# Altium PCB PCB1_Pt100.PcbDoc (part 1 of 2)
Units mm, origin at the board's own origin, x right, y up, seen from the top; angles counter-clockwise.
Board outline 125.73 x 96.9 mm, 2 copper layers (Top Layer, Bottom Layer); 98 components, 73 nets, 365 pads, 113 vias.
Unrouted connection lines stored in the file: 47.
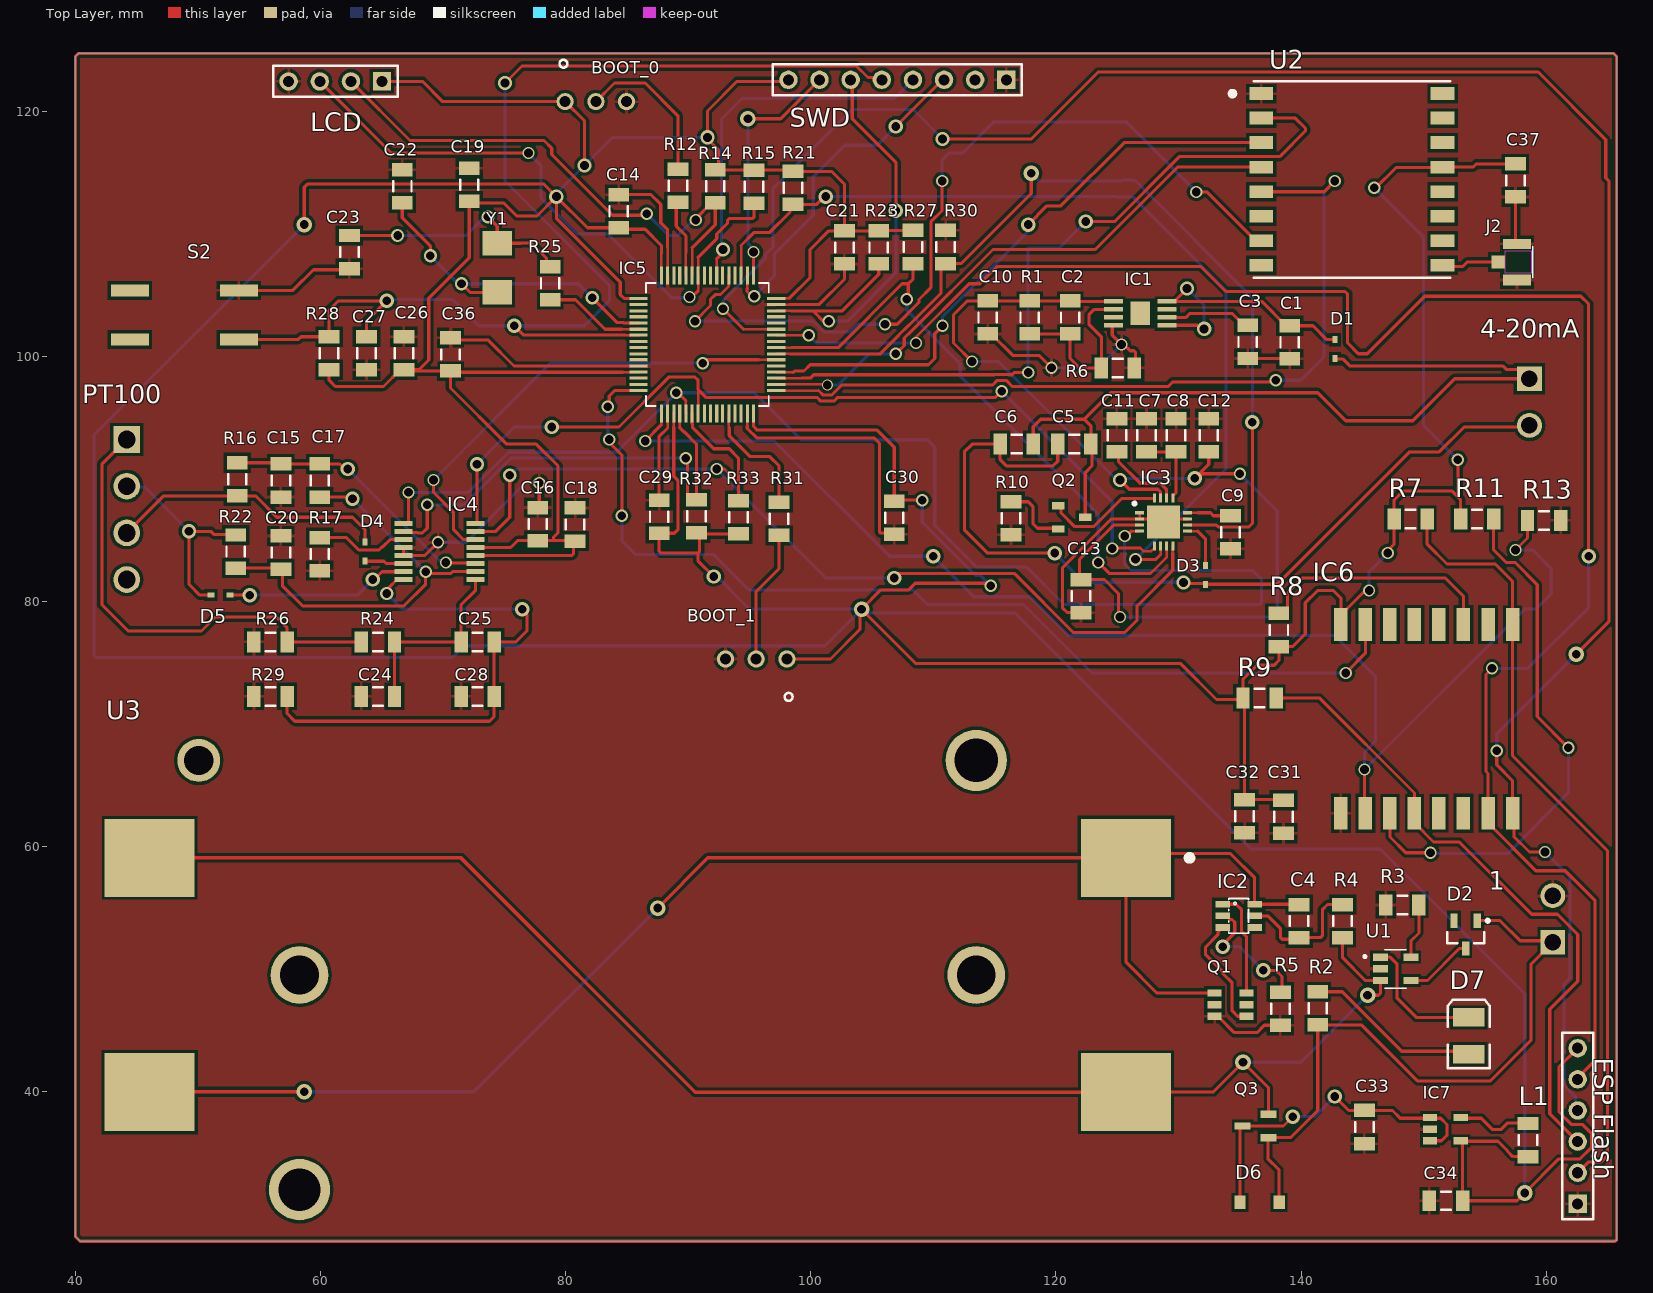
[diagram p0: Top Layer view]
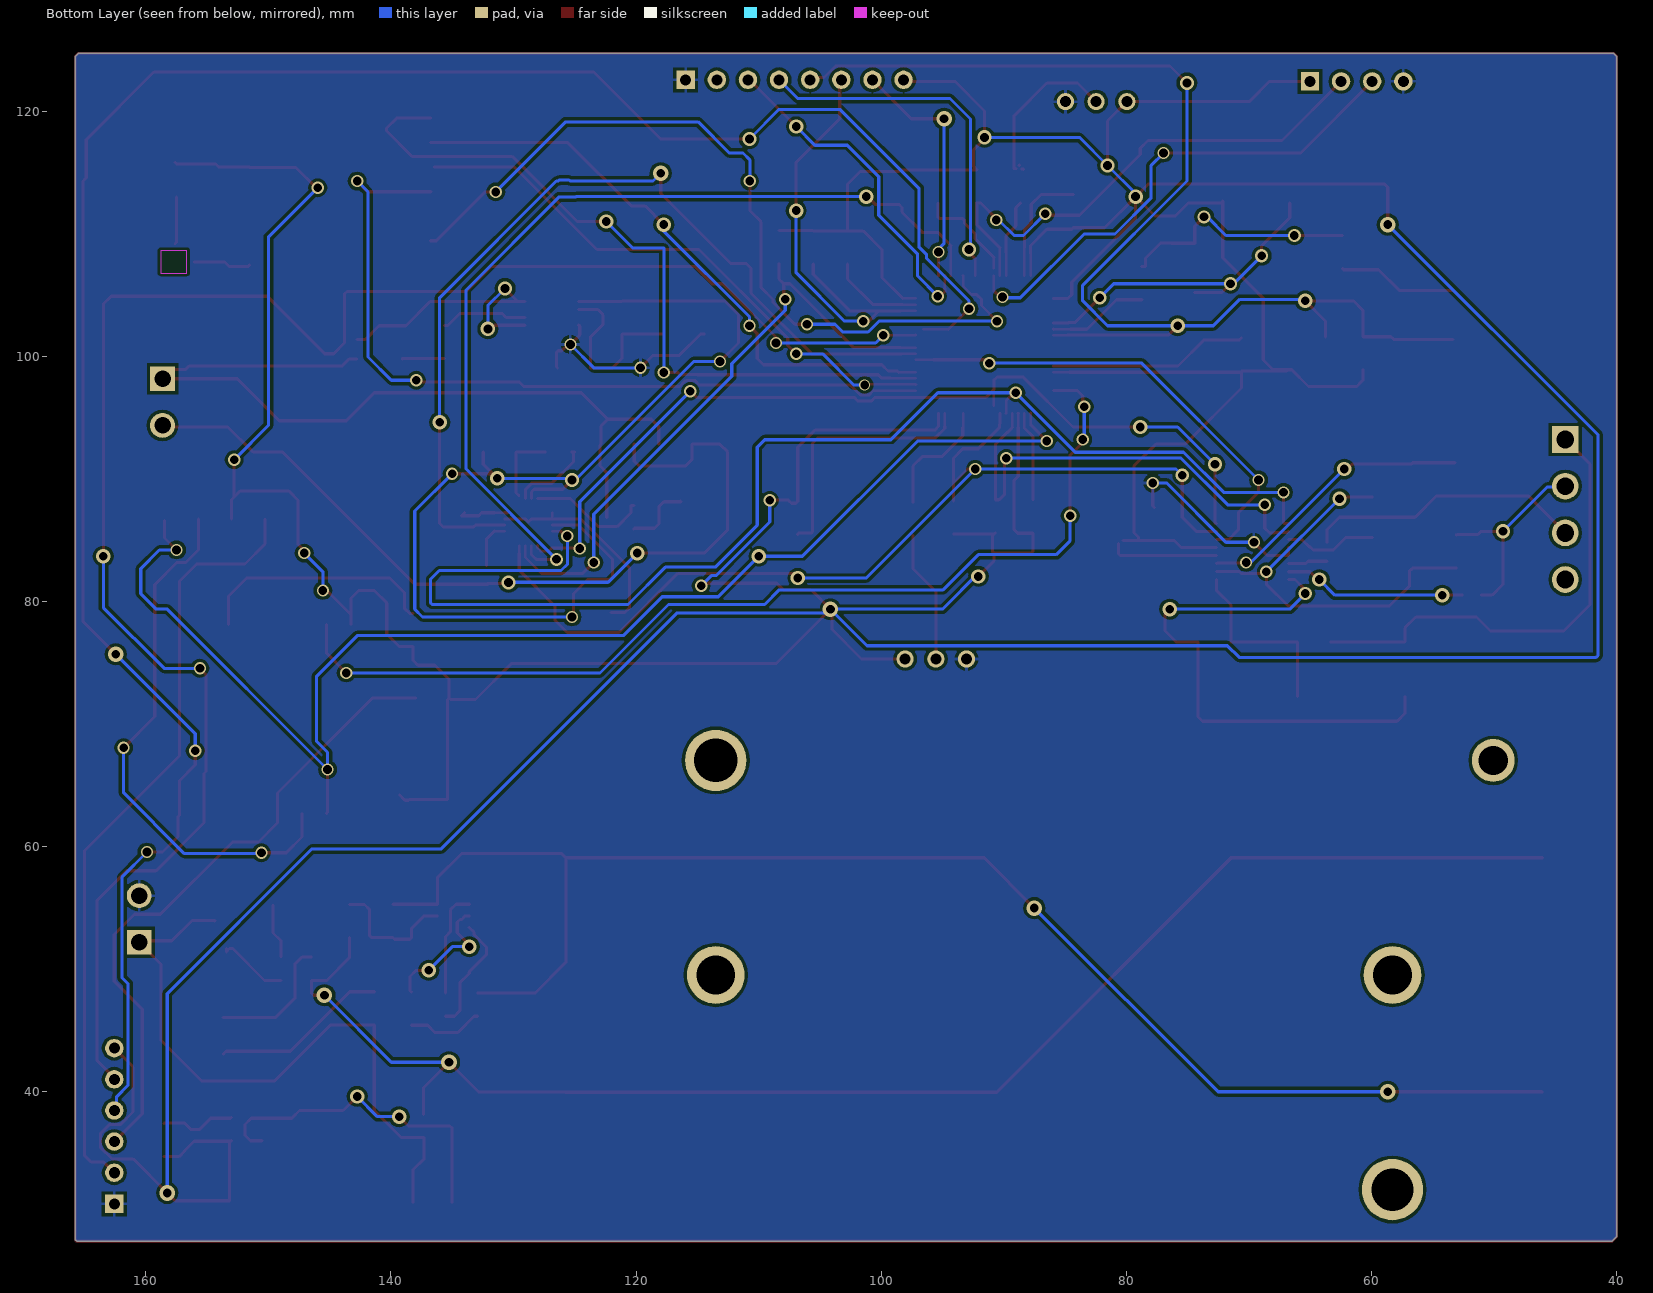
[diagram p1: Bottom Layer view, seen from below]

## Layer stack, top to bottom
Top Solder: solder mask 0.0102, Solder Resist, Dk 3.5
Top Layer: signal copper 0.0356
Dielectric 1: dielectric 0.32, FR-4, Dk 4.8
Bottom Layer: signal copper 0.0356
Bottom Solder: solder mask 0.0102, Solder Resist, Dk 3.5

## Board outline
40.005,28.194 40.005,124.46 40.259,124.714 165.481,124.714 165.735,124.46 165.735,27.94 165.608,27.813 40.386,27.813

## Design rules (kind name [scope] priority, off if disabled: settings)
Clearance [All] p1: gap=0.254 ignorepadtopadclearanceinfootprint=FALSE except(0: Arc-Hole Track-Hole SMDPad-Hole THPad-Hole Via-Hole Fill-Hole Poly-Hole Region-Hole Text-Hole; 0.23: Arc-Arc Arc-Track Arc-SMDPad Track-Track Track-SMDPad SMDPad-SMDPad)
PolygonConnect [All] p1: connectstyle=Relief reliefconductorwidth=0.254 reliefentries=4 polygonreliefangle="90 Angle" airgapwidth=0.254
RoutingVias [All] p1: holewidth=0.711 width=1.27 viastyle="Through Hole" minholewidth=0.711 minwidth=1.27 maxholewidth=0.711 maxwidth=1.27
SolderMaskExpansion [All] p1: expansion=0.102
Width [All] p1: maxlimit=0.254 minlimit=0.254 preferedwidth=0.254
30 further rules are at their usual default settings.

## Components (designator, comment, footprint, x,y, rotation, side; value= is the part's Value field where it differs from the comment)
1 "P=3.81mm Screw terminal   Source:  Datasheet" SHDR2W80P0X381_1X2_802X740X880 160.528,52.197 r90 top
4-20mA "P=3.81mm Screw terminal   Source:  Datasheet" SHDR2W80P0X381_1X2_802X740X880 158.623,98.171 r270 top
BOOT_0 "Slide Switch   Source:  Datasheet" 3PIN_SLIDE_SWITCH 82.463,120.777 r0 top
BOOT_1 "Slide Switch   Source:  Datasheet" 3PIN_SLIDE_SWITCH 95.544,75.311 r180 top
C1 "" C1206 139.065,101.139 r90 top value=10uF
C2 "" C1206 121.158,103.171 r90 top value=10nF
C3 "" C1206 135.636,101.172 r90 top value=10nF
C4 "Cap" C1206 139.827,53.928 r270 top value=100nF
C5 "" C1206 121.492,92.837 r0 top value=0.01uF
C6 "" C1206 116.793,92.837 r0 top value=10uF
C7 "" C1206 127.381,93.552 r270 top value=0.22uF
C8 "" C1206 129.794,93.552 r270 top value=6800pF
C9 "" C1206 134.239,85.645 r270 top value=0.39uF
C10 "" C1206 114.427,103.171 r90 top value=10uF
C11 "" C1206 124.968,93.552 r270 top value=1000pF
C12 "" C1206 132.461,93.552 r270 top value=0.1uF
C13 "" C1206 122.047,80.438 r90 top value=0.1uF
C14 "" C1206 84.328,111.84 r270 top value=100nF
C15 "Cap" C1206 56.769,89.869 r90 top value=2700pF
C16 "" C1206 77.724,86.313 r270 top value=0.1uF
C17 "Cap" C1206 59.944,89.869 r90 top value=0.027uF
C18 "" C1206 80.772,86.28 r270 top value=0.1uF
C19 "" C1206 72.136,113.999 r90 top value=1uF
C20 "Cap" C1206 56.769,83.994 r270 top value=2700pF
C21 "" C1206 102.743,108.886 r90 top value=100nF
C22 "" C1206 66.675,113.872 r90 top value=18pF
C23 "" C1206 62.357,108.505 r90 top value=18pF
C24 "Cap" C1206 64.69,72.263 r0 top value=1800pF
C25 "Cap" C1206 72.818,76.708 r180 top value=0.018uF
C26 "" C1206 66.802,100.25 r270 top value=10uF
C27 "" C1206 63.754,100.25 r90 top value=0.1uF
C28 "Cap" C1206 72.818,72.263 r0 top value=1800pF
C29 "" C1206 87.63,86.915 r270 top value=100nF
C30 "" C1206 106.807,86.821 r90 top value=100nF
C31 "" C1206 138.557,62.437 r90 top value=10uF
C32 "" C1206 135.382,62.484 r90 top value=100nF
C33 "Cap" C1206 145.161,37.131 r90 top value=10uF
C34 "Cap" C1206 151.812,31.115 r0 top value=10uF
C36 "" C1206 70.612,100.156 r270 top value=100nF
C37 "" C1206 157.48,114.347 r90 top value=10uF
D1 "Diodes Inc 40V 350mA, Diode, 2-Pin SOD-523 ZHCS350TA   Source:  Datasheet" SODFL1608X65N 142.748,100.584 r270 top
D2 "Diode BAS116" SOT-23_N 153.416,52.832 r270 top
D3 "Diodes Inc 40V 350mA, Diode, 2-Pin SOD-523 ZHCS350TA   Source:  Datasheet" SODFL1608X65N 132.207,82.169 r90 top
D4 "Diodes Inc 40V 350mA, Diode, 2-Pin SOD-523 ZHCS350TA   Source:  Datasheet" SODFL1608X65N 63.627,84.061 r270 top
D5 "Diodes Inc 40V 350mA, Diode, 2-Pin SOD-523 ZHCS350TA   Source:  Datasheet" SODFL1608X65N 51.829,80.518 r0 top
D6 "Diode, NXP, PMEG3010ER NXP PMEG3010ER, SMT Schottky Diode, 30V 1A, 2-Pin SOD-123   Source:  Datasheet" SODFL3517X110N 136.601,30.988 r0 top
D7 "LED3" 3.5X2.8X1.9 153.67,44.577 r90 top
"ESP Flash" "Header 6" HDR1X6 162.56,30.861 r90 top
IC1 "Vin 3V to 36V, 150mA, Ultra-Low-Noise, High-PSRR Low-Dropout (LDO) Linear Regulator   Source:  Datasheet" SOP65P490X110-9N 126.873,103.505 r0 top
IC2 "DW01A" *SOT23-6 134.904,54.356 r270 top
IC3 "16-Bit Precision DAC With Internal Reference and 4mA-to-20mA Current Loop Drive   Source:  Datasheet" QFN50P400X400X80-17N 128.778,86.487 r0 top
IC4 "24-bit, 2-kSPS, 4-ch, low-power, small-size delta-sigma ADC w/ PGA, VREF, 2x IDACs & SPI interface   Source:  Datasheet" SOP65P640X120-16N 69.723,84.074 r0 top
IC5 "STM32F103RBT6, 32 bit ARM Cortex M3 Microcontroller 72MHz 128kb Flash, 20kb RAM, USB I2C SPI 64-Pin LQFP   Source:  Datasheet" *QFP50P1200X1200X160-64N 91.567,100.965 r0 top
IC6 "RF SOLUTIONS - ESP-12S - WIFI MODULE, 2.484GHZ, 9 I/O PORT   Source:  Datasheet" ESP12S 150.241,71.12 r270 top
IC7 "Sw. Reg. PWM/PFM 2MHz 500mA 3.3V TSOT5   Source:  Datasheet" SOT95P280X110-5N 151.765,36.957 r0 top
J2 "U.FL-R-SMT(01)" *HRS_U.FL-R-SMT(01) 157.607,107.696 r270 top
L1 "" C1206 158.496,36.068 r90 top value=4.7uH
LCD "Header 4" HDR1X4 65.024,122.428 r180 top
PT100 "European P.C.B. type terminal blocks  EK series 4 pole   Source:  Datasheet" SHDR4W90P0X381_1X4_1524X740X85 44.196,93.218 r270 top
Q1 "Dual N-Channel Enhancement Mode MOSFET   Source:  Datasheet" SOT95P285X140-6N 134.239,47.117 r0 top
Q2 "MMBT3904 - NPN switching transistor   Source:  Datasheet" SOT95P230X110-3N 121.285,86.868 r0 top
Q3 "INFINEON - IRLML6401TRPBF - MOSFET, P, MICRO3   Source:  Datasheet" SOT95P237X112-3N 136.271,37.211 r180 top
R1 "" C1206 117.856,103.171 r90 top value=178K
R2 "Res1" C1206 141.351,46.816 r90 top value=330R
R3 "Res1" C1206 148.256,55.245 r0 top value=2K
R4 "Res1" C1206 143.383,53.928 r90 top value=470R
R5 "" C1206 138.303,46.783 r90 top value=2K
R6 "" C1206 125.048,99.06 r180 top value=100K
R7 "" C1206 148.924,86.741 r0 top value=10K
R8 "" C1206 138.176,77.677 r90 top value=10K
R9 "" C1206 136.605,72.136 r0 top value=10K
R10 "1%" C1206 116.332,86.788 r270 top value=20
R11 "" C1206 154.352,86.741 r0 top value=10K
R12 "" C1206 89.154,113.919 r90 top value=10K
R13 "" C1206 159.813,86.614 r0 top value=10K
R14 "" C1206 92.202,113.872 r90 top value=4.7K
R15 "" C1206 95.377,113.839 r90 top value=4.7K
R16 "" C1206 53.213,89.963 r270 top value=4.12K
R17 "" C1206 59.944,83.867 r90 top value=10K
R21 "" C1206 98.552,113.745 r90 top value=10K
R22 "" C1206 53.086,84.074 r90 top value=4.12K
R23 "" C1206 105.537,108.886 r270 top value=100K
R24 "" C1206 64.69,76.708 r180 top value=4.12K
R25 "" C1206 78.74,105.965 r90 top value=300
R26 "10 ppm/C 0.1%" C1206 55.927,76.708 r0 top value=3.24K
R27 "" C1206 108.331,108.919 r90 top value=10K
R28 "" C1206 60.706,100.25 r270 top value=10K
R29 "Res1" C1206 55.927,72.263 r180 top value=4.12K
R30 "" C1206 110.998,108.919 r270 top value=10K
R31 "" C1206 97.409,86.741 r90 top value=10K
R32 "" C1206 90.678,86.948 r270 top value=10K
R33 "" C1206 94.107,86.868 r270 top value=10K
S2 "IP67 Button Tactile Switch, SPST 50 mA 3.5mm Surface Mount   Source:  Datasheet" KSC401G50SHLFS 48.895,103.378 r180 top
SWD "Debug" HDR1X8 115.951,122.555 r180 top
U1 "MCP73831T-2ATI/OT" *SOT95P280X145-5N 147.701,50.038 r0 top
U2 "RFM95W-868S2" *XCVR_RFM95W-868S2 144.145,114.427 r0 top
U3 "KEYSTONE - 1048 - BATTERY HOLDER, 18650 LI-ION, 2CELL, SMD   Source:  Datasheet" 1048 113.493,67.035 r180 top
Y1 "Automotive use crystal unit, 2-pin, NX5032GA   Source:  Datasheet" NX5032GA 74.422,107.22 r90 top

## Footprints (in the part's own frame and the unit in brackets; to place one, negate y for a bottom-side part, rotate by r counter-clockwise, add the part's x,y. Pads: shape width x height; smd on the part's side, far side on the other; paste and mask are expansions set on the pad)
3.5X2.8X1.9 [mm] "SM LED; 2 C-Bend Leads; Body 3.5 x 2.8 x 1.9 mm, inc leads (LxWxH typ)"
  rect 1.5x2.6 smd: 1(-1.5,0) 2(1.5,0)
  silkscreen extent -2.65,-1.7 2.95,1.7
3PIN_SLIDE_SWITCH [mm]
  round 1.4 / inner round 1.524 / far side round 1.4 hole 0.9: 1(-2.5,0) 2(0,0) 3(2.5,0)
  silkscreen extent -2.96,2.77 -2.32,3.41
1048 [mm]
  rect 7.34x6.35 smd: 1(-12.225,7.95) 2(67.425,7.95) 3(67.425,27.06) 4(-12.225,27.06)
  round 4.7 / inner round 1.524 / far side round 4.7 hole 3.17: 5(0,17.505) 7(55.2,17.505)
  round 5 / inner round 1.524 / far side round 5 hole 3.54: 6(0,0)
  round 3.5 / inner round 1.524 / far side round 3.5 hole 2.39: 8(63.42,0)
  round 5 / inner round 1.524 / far side round 5 hole 3.45: 9(55.2,35.01)
  silkscreen extent -17.62,7.72 -17.17,8.17
*HRS_U.FL-R-SMT(01) [mm]
  rect 0.8x2.25 smd: 1(-1.475,0)
  rect 0.9x2.25 smd: 2(1.475,0)
  rect 1.05x1.1 smd: 3(0,-1.55)
  Keep-Out Layer region: -0.903,1.15 0.9,1.15 0.9,-0.963 -0.903,-0.963
  Keep-Out Layer region: -0.903,1.15 0.9,1.15 0.9,-0.963 -0.903,-0.963
  Keep-Out Layer region: -0.903,1.15 0.9,1.15 0.9,-0.963 -0.903,-0.963
  silkscreen extent -1.3,1.3 1.3,1.3
*QFP50P1200X1200X160-64N [mil]
  rect 58x9.84 smd: 1(-221,148) 2(-221,128) 3(-221,108) 4(-221,89) 5(-221,69) 6(-221,49) 7(-221,30) 8(-221,10) 9(-221,-10) 10(-221,-30) 11(-221,-49) 12(-221,-69) 13(-221,-89) 14(-221,-108) 15(-221,-128) 16(-221,-148) 33(221,-148) 34(221,-128) 35(221,-108) 36(221,-89) 37(221,-69) 38(221,-49) 39(221,-30) 40(221,-10) 41(221,10) 42(221,30) 43(221,49) 44(221,69) 45(221,89) 46(221,108) 47(221,128) 48(221,148)
  rect 9.84x58 smd: 17(-148,-221) 18(-128,-221) 19(-108,-221) 20(-89,-221) 21(-69,-221) 22(-49,-221) 23(-30,-221) 24(-10,-221) 25(10,-221) 26(30,-221) 27(49,-221) 28(69,-221) 29(89,-221) 30(108,-221) 31(128,-221) 32(148,-221) 49(148,221) 50(128,221) 51(108,221) 52(89,221) 53(69,221) 54(49,221) 55(30,221) 56(10,221) 57(-10,221) 58(-30,221) 59(-49,221) 60(-69,221) 61(-89,221) 62(-108,221) 63(-128,221) 64(-148,221)
  silkscreen extent -197,-197 197,197
*SOT23-6 [mm]
  rect 0.55x1.2 smd: 1(-0.95,-1.3) 2(0,-1.3) 3(0.95,-1.3) 4(0.95,1.3) 5(0,1.3) 6(-0.95,1.3)
  silkscreen extent -1.42,-0.81 1.42,0.81
*SOT95P280X145-5N [mm]
  rect 1.22x0.6 smd: 1(-1.245,0.95) 2(-1.245,0) 3(-1.245,-0.95) 4(1.245,-0.95) 5(1.245,0.95)
  silkscreen extent -2.6,-1.57 0.88,1.57
*XCVR_RFM95W-868S2 [mm]
  rect 1.95x1.05 smd: 1(-7.4,7) 2(-7.4,5) 3(-7.4,3) 4(-7.4,1) 5(-7.4,-1) 6(-7.4,-3) 7(-7.4,-5) 8(-7.4,-7) 9(7.4,-7) 10(7.4,-5) 11(7.4,-3) 12(7.4,-1) 13(7.4,1) 14(7.4,3) 15(7.4,5) 16(7.4,7)
  silkscreen extent -10.04,-8 8,8
C1206 [mm] "Chip Capacitor, Body 3.2x1.6mm, IPC High Density"
  rect 1.1x1.7 smd: 1(-1.35,0) 2(1.35,0)
  silkscreen extent -0.4,-0.75 0.4,0.75, body extent -1.7,-0.9 1.7,0.9, height 1.3
ESP12S [mm]
  rect 2.66x1.1 smd: 1(-7,7) 2(-7,5) 3(-7,3) 4(-7,1) 5(-7,-1) 6(-7,-3) 7(-7,-5) 8(-7,-7) 9(8.4,-7) 10(8.4,-5) 11(8.4,-3) 12(8.4,-1) 13(8.4,1) 14(8.4,3) 15(8.4,5) 16(8.4,7)
HDR1X4 [mm] "Connector; Header; 4 Position"
  rect 1.5x1.5 hole 0.9: 1(0,0)
  round 1.5 hole 0.9: 2(2.54,0) 3(5.08,0) 4(7.62,0)
  silkscreen extent -1.27,-1.27 8.89,1.27
HDR1X6 [mm] "Connector; Header; 6 Position"
  rect 1.5x1.5 hole 0.9: 1(0,0)
  round 1.5 hole 0.9: 2(2.54,0) 3(5.08,0) 4(7.62,0) 5(10.16,0) 6(12.7,0)
  silkscreen extent -1.27,-1.27 13.97,1.27
HDR1X8 [mm] "Connector; Header; 8 Position"
  rect 1.5x1.5 hole 0.9: 1(0,0)
  round 1.5 hole 0.9: 2(2.54,0) 3(5.08,0) 4(7.62,0) 5(10.16,0) 6(12.7,0) 7(15.24,0) 8(17.78,0)
  silkscreen extent -1.27,-1.27 19.05,1.27
KSC401G50SHLFS [mm]
  rect 3.1x1 smd: 1(-4.445,2) 2(-4.445,-2) 3(4.445,-2) 4(4.445,2)
NX5032GA [mm]
  rect 2x2.4 smd: 1(-2,0) 2(2,0)
QFN50P400X400X80-17N [mm]
  rect 0.73x0.25 smd: 1(-1.95,0.75) 2(-1.95,0.25) 3(-1.95,-0.25) 4(-1.95,-0.75) 9(1.95,-0.75) 10(1.95,-0.25) 11(1.95,0.25) 12(1.95,0.75)
  rect 0.25x0.73 smd: 5(-0.75,-1.95) 6(-0.25,-1.95) 7(0.25,-1.95) 8(0.75,-1.95) 13(0.75,1.95) 14(0.25,1.95) 15(-0.25,1.95) 16(-0.75,1.95)
  rect 2.7x2.7 smd: 17(0,0)
  silkscreen extent -2.5,1.38 -2.25,1.62
SHDR2W80P0X381_1X2_802X740X880 [mm]
  rect 2.025x2.025 / inner rect 1.524x1.524 / far side rect 2.025x2.025 hole 1.35: 1(0,0)
  round 2.025 / inner round 1.524 / far side round 2.025 hole 1.35: 2(3.81,0)
SHDR4W90P0X381_1X4_1524X740X85 [mm]
  rect 2.175x2.175 / inner rect 1.524x1.524 / far side rect 2.175x2.175 hole 1.45: 1(0,0)
  round 2.175 / inner round 1.524 / far side round 2.175 hole 1.45: 2(3.81,0) 3(7.62,0) 4(11.43,0)
SODFL1608X65N [mm]
  rect 0.57x0.42 smd: 1(-0.775,0) 2(0.775,0)
SODFL3517X110N [mm]
  rect 0.92x1.08 smd: 1(-1.6,0) 2(1.6,0)
SOP65P490X110-9N [mm]
  rect 1.55x0.35 smd: 1(-2.2,0.975) 2(-2.2,0.325) 3(-2.2,-0.325) 4(-2.2,-0.975) 5(2.2,-0.975) 6(2.2,-0.325) 7(2.2,0.325) 8(2.2,0.975)
  rect 1.6x1.92 smd: 9(0,0)
SOP65P640X120-16N [mm]
  rect 1.475x0.42 smd: 1(-2.938,2.275) 2(-2.938,1.625) 3(-2.938,0.975) 4(-2.938,0.325) 5(-2.938,-0.325) 6(-2.938,-0.975) 7(-2.938,-1.625) 8(-2.938,-2.275) 9(2.938,-2.275) 10(2.938,-1.625) 11(2.938,-0.975) 12(2.938,-0.325) 13(2.938,0.325) 14(2.938,0.975) 15(2.938,1.625) 16(2.938,2.275)
SOT95P230X110-3N [mm]
  rect 1.05x0.6 smd: 1(-1.1,0.95) 2(-1.1,-0.95) 3(1.1,0)
SOT95P237X112-3N [mm]
  rect 1.3x0.6 smd: 1(-1.05,0.95) 2(-1.05,-0.95) 3(1.05,0)
SOT95P280X110-5N [mm]
  rect 1.15x0.6 smd: 1(-1.25,0.95) 2(-1.25,0) 3(-1.25,-0.95) 4(1.25,-0.95) 5(1.25,0.95)
SOT95P285X140-6N [mm]
  rect 1.15x0.6 smd: 1(-1.3,0.95) 2(-1.3,0) 3(-1.3,-0.95) 4(1.3,-0.95) 5(1.3,0) 6(1.3,0.95)
SOT-23_N [mm] "SOT23, 3-Leads, Body 2.9x1.3mm, Pitch 0.95mm, Lead Span 2.5mm, IPC Medium Density"
  rect 1.15x0.6 smd: 1(-1.125,0.95) 2(-1.125,-0.95) 3(1.125,0)
  silkscreen extent -1.25,-1.5 0.7,1.93, body extent -0.7,-1.5 0.7,1.5, height 1.1

## Part data
1 4-20mA: library part DB125-3.81-2P, Manufacturer_Name=Dibo, Package=SHDR2W80P0X381_1X2_802X740X880, DeviceSetName=DB125-3.81-2P, GateName_1=G$1, Height=8.8mm, LibraryName=DB125-3.81-2P, Manufacturer_Part_Number=DB125-3.81-2P, SymbolName_1=DB125-3.81-2P
BOOT_0 BOOT_1: library part EG1218, Manufacturer_Name=E-Switch, Package=3PIN_SLIDE_SWITCH, DeviceSetName=EG1218, GateName_1=G$1, Height=mm, LibraryName=EG1218, Manufacturer_Part_Number=EG1218, Mouser_Part_Number=612-EG1218, Mouser_Price-Stock=https://www.mouser.co.uk/ProductDetail/E-Switch/EG1218?qs=xDsBkp9LkocT0c8K%252B5e%2FgA%3D%3D, SymbolName_1=EG1218
C1 C2 C3 C5 C6 C7 C8 C9 C10 C11 C12 C13 C14 C16 C18 C19 C21 C22 C23 C26 C27 C29 C30 C31 C32 C36 C37: library part Cap, "Capacitor", LatestRevisionDate=17-Jul-2002, LatestRevisionNote="Re-released for DXP Platform.", PackageDescription="Radial Cap, Thru-Hole; 2 Leads; 0.3 in Pin Spacing", PackageReference=RAD-0.3, Published=8-Jun-2000, Publisher="Altium Limited"
C4 C15 C17 C20 C24 C25 C28 C33 C34: "Capacitor", LatestRevisionDate=17-Jul-2002, LatestRevisionNote="Re-released for DXP Platform.", PackageDescription="Radial Cap, Thru-Hole; 2 Leads; 0.3 in Pin Spacing", PackageReference=RAD-0.3, Published=8-Jun-2000, Publisher="Altium Limited"
D1 D3 D4 D5: library part ZHCS350TA, Manufacturer_Name="Diodes Inc.", Package=SODFL1608X65N, Allied_Number=70438611, Allied_Price-Stock=https://www.alliedelec.com/diodesinc-zhcs350ta/70438611/, DeviceSetName=ZHCS350TA, GateName_1=G$1, Height=0.65mm, LibraryName=ZHCS350TA, Manufacturer_Part_Number=ZHCS350TA, Mouser_Part_Number=522-ZHCS350TA, Mouser_Price-Stock=https://www.mouser.co.uk/ProductDetail/Diodes-Incorporated/ZHCS350TA?qs=%2F4dsY8i%2FUxLp1LQSBxPJBA%3D%3D, RS_Part_Number=7515168P, RS_Price-Stock=http://uk.rs-online.com/web/p/products/7515168P, SymbolName_1=ZHCS350TA
D2: "Silicon Low Leakage Diode", ComponentLink1Description="Manufacturer Link", ComponentLink1URL=http://www.infineon.com/, ComponentLink2Description=Datasheet, ComponentLink2URL=http://www.infineon.com/upload/Document/cmc_upload/documents/080/656/bas116series.pdf, DatasheetVersion=Oct-1999, LatestRevisionDate=29-May-2009, LatestRevisionNote="IPC-7351 Footprint Added.", Note="Pin 2 is not connected and not drawn.", PackageDescription="3-Pin SOT-23 Package 0.95 mm Pitch, 2.5 mm Lead Span", PackageReference=SOT-23, PackageVersion=Sep-2001, Published=21-Mar-2003, Publisher="Altium Limited"
D6: library part PMEG3010ER, Manufacturer_Name=Nexperia, Package=SODFL3517X110N, DeviceSetName=PMEG3010ER, GateName_1=G$1, Height=1.1mm, LibraryName=PMEG3010ER, Manufacturer_Part_Number=PMEG3010ER, Mouser_Part_Number=N/A, Mouser_Price-Stock=https://www.mouser.com/Search/Refine.aspx?Keyword=N%2FA, SymbolName_1=PMEG3010ER
D7: "Typical BLUE SiC LED", DatasheetVersion=16-Apr-2002, LatestRevisionDate=17-Dec-2003, LatestRevisionNote="PCB Footprint replaced.", PackageDescription="SM LED; 2 C-Bend Leads; Body 3.5 x 2.8 x 1.9 mm, inc leads (LxWxH typ)", PackageReference=3.5X2.8X1.9, PackageVersion=16-Apr-2002, Published=8-Jun-2000, Publisher="Altium Limited"
"ESP Flash": "Header, 6-Pin", LatestRevisionDate=17-Jul-2002, LatestRevisionNote="Re-released for DXP Platform.", Publisher="Altium Limited"
IC1: library part TPS7A4901DGNR, Manufacturer_Name="Texas Instruments", Package=SOP65P490X110-9N, DeviceSetName=TPS7A4901DGNR, GateName_1=G$1, Height=1.1mm, LibraryName=TPS7A4901DGNR, Manufacturer_Part_Number=TPS7A4901DGNR, Mouser_Part_Number=595-TPS7A4901DGNR, Mouser_Price-Stock=https://www.mouser.co.uk/ProductDetail/Texas-Instruments/TPS7A4901DGNR?qs=Ze4%2FuFuz19J1%252B3gTImnAgQ%3D%3D, SymbolName_1=TPS7A4901DGNR
IC2: "One Cell Lithium-ion/Polymer Battery Protection IC", Package="Package Analog Devices", Availability=Unavailable, MF="Fortune Semiconductor", MP=DW01A, Price=None, SnapEDA_Link=https://www.snapeda.com/parts/DW01A/Fortune%20Semiconductor/view-part/4388554/?ref=snap
IC3: library part DAC161S997RGHR, Manufacturer_Name="Texas Instruments", Package=QFN50P400X400X80-17N, DeviceSetName=DAC161S997RGHR, GateName_1=G$1, Height=0.8mm, LibraryName=DAC161S997RGHR, Manufacturer_Part_Number=DAC161S997RGHR, Mouser_Part_Number=595-DAC161S997RGHR, Mouser_Price-Stock=https://www.mouser.co.uk/ProductDetail/Texas-Instruments/DAC161S997RGHR?qs=NKcqT0VB0vDKlEVGENNOUQ%3D%3D, SymbolName_1=DAC161S997RGHR
IC4: library part ADS1220IPWR, Manufacturer_Name="Texas Instruments", Package=SOP65P640X120-16N, DeviceSetName=ADS1220IPWR, GateName_1=G$1, Height=1.2mm, LibraryName=ADS1220IPWR, Manufacturer_Part_Number=ADS1220IPWR, Mouser_Part_Number=595-ADS1220IPWR, Mouser_Price-Stock=https://www.mouser.co.uk/ProductDetail/Texas-Instruments/ADS1220IPWR?qs=5GI1giJCN%252BI6s%2FWJGbZXXQ%3D%3D, SymbolName_1=ADS1220IPWR
IC5: library part STM32F103RBT6, Manufacturer_Name=STMicroelectronics, Package=QFP50P1200X1200X160-64N, Allied_Number=70391006, Allied_Price-Stock=http://www.alliedelec.com/stmicroelectronics-stm32f103rbt6/70391006/, DeviceSetName=STM32F103RBT6, GateName_1=G$1, Height=1.6mm, LibraryName=STM32F103RBT6, Manufacturer_Part_Number=STM32F103RBT6, Mouser_Part_Number=511-STM32F103RBT6, Mouser_Price-Stock=https://www.mouser.co.uk/ProductDetail/STMicroelectronics/STM32F103RBT6?qs=bhCVus9SdFv12dJRZaBmJg%3D%3D, RS_Part_Number=0402251P, RS_Price-Stock=http://uk.rs-online.com/web/p/products/0402251P, SymbolName_1=STM32F103RBT6
IC6: library part ESP-12S, Manufacturer_Name="RF SOLUTIONS", Package=ESP12S, DeviceSetName=ESP-12S, GateName_1=G$1, Height=3mm, LibraryName=ESP-12S, Manufacturer_Part_Number=ESP-12S, Mouser_Part_Number=223-ESP-12S, Mouser_Price-Stock=https://www.mouser.co.uk/ProductDetail/RF-Solutions/ESP-12S?qs=UkDUCjYnTB27YArJ5wHUxg%3D%3D, RS_Part_Number=1697593, RS_Price-Stock=http://uk.rs-online.com/web/p/products/1697593, SymbolName_1=ESP-12S
IC7: library part MCP1603T-330I_OS, Manufacturer_Name=Microchip, Manufacturer_Part_Number=MCP1603T-330I/OS, Package=SOT95P280X110-5N, Allied_Number=70046434, Allied_Price-Stock=http://www.alliedelec.com/microchip-technology-inc-mcp1603t-330i-os/70046434/, DeviceSetName=MCP1603T-330I_OS, GateName_1=G$1, Height=1.1mm, LibraryName=MCP1603T-330I_OS, Mouser_Part_Number=579-MCP1603T-330I/OS, Mouser_Price-Stock=https://www.mouser.co.uk/ProductDetail/Microchip-Technology/MCP1603T-330I-OS?qs=usxtMOJb1RzTHtIF7bKmHg%3D%3D, RS_Part_Number=7386235P, RS_Price-Stock=http://uk.rs-online.com/web/p/products/7386235P, SymbolName_1=MCP1603T-330I_OS
J2: "U.FL _UMCC_ Connector Receptacle, Male Pin 50Ohm Surface Mount Solder", Package=None, Availability=Unavailable, MF=Hirose, MP=U.FL-R-SMT_01_, Price=None, SnapEDA_Link=https://www.snapeda.com/parts/U.FL-R-SMT%2801%29/Hirose%20Electric%20Co%20Ltd/view-part/1218914/?ref=snap
L1 R1 R5 R6 R7 R8 R9 R10 R11 R12 R13 R14 R15 R16 R17 R21 R22 R23 R24 R25 R26 R27 R28 R30 R31 R32 R33: library part Res1, "Resistor", LatestRevisionDate=17-Jul-2002, LatestRevisionNote="Re-released for DXP Platform.", PackageDescription="Axial Device, Thru-Hole; 2 Leads; 0.3 in Pin Spacing", PackageReference=AXIAL-0.3, Published=8-Jun-2000, Publisher="Altium Limited"
LCD: "Header, 4-Pin", LatestRevisionDate=17-Jul-2002, LatestRevisionNote="Re-released for DXP Platform.", Publisher="Altium Limited"
PT100: library part EK381V-04P, Manufacturer_Name=Dinkle, Package=SHDR4W90P0X381_1X4_1524X740X85, DeviceSetName=EK381V-04P, GateName_1=G$1, Height=8.5mm, LibraryName=EK381V-04P, Manufacturer_Part_Number=EK381V-04P, SymbolName_1=EK381V-04P
Q1: library part UMW8205A, Manufacturer_Name=UMW, Package=SOT95P285X140-6N, DeviceSetName=UMW8205A, GateName_1=G$1, Height=1.4mm, LibraryName=UMW8205A, Manufacturer_Part_Number=UMW8205A, SymbolName_1=UMW8205A
Q2: library part MMBT3904VL, Manufacturer_Name=Nexperia, Package=SOT95P230X110-3N, DeviceSetName=MMBT3904VL, GateName_1=G$1, Height=1.1mm, LibraryName=MMBT3904VL, Manufacturer_Part_Number=MMBT3904VL, Mouser_Part_Number=771-MMBT3904VL, Mouser_Price-Stock=https://www.mouser.co.uk/ProductDetail/Nexperia/MMBT3904VL?qs=cnAQGvEIVkKbCwIpHJoHxQ%3D%3D, SymbolName_1=MMBT3904VL
Q3: library part IRLML6401TRPBF, Manufacturer_Name=Infineon, Package=SOT95P237X112-3N, Allied_Number=70017403, Allied_Price-Stock=https://www.alliedelec.com/infineon-irlml6401trpbf/70017403/, DeviceSetName=IRLML6401TRPBF, GateName_1=G$1, Height=1.12mm, LibraryName=IRLML6401TRPBF, Manufacturer_Part_Number=IRLML6401TRPBF, Mouser_Part_Number=942-IRLML6401TRPBF, Mouser_Price-Stock=https://www.mouser.co.uk/ProductDetail/Infineon-Technologies/IRLML6401TRPBF?qs=9%252BKlkBgLFf1wviSVMCNr8A%3D%3D, RS_Part_Number=0301316P, RS_Price-Stock=http://uk.rs-online.com/web/p/products/0301316P, SymbolName_1=IRLML6401TRPBF
R2 R3 R4 R29: "Resistor", LatestRevisionDate=17-Jul-2002, LatestRevisionNote="Re-released for DXP Platform.", PackageDescription="Axial Device, Thru-Hole; 2 Leads; 0.3 in Pin Spacing", PackageReference=AXIAL-0.3, Published=8-Jun-2000, Publisher="Altium Limited"
S2: library part KSC222GLFS, Manufacturer_Name="C & K COMPONENTS", Package=KSC401G50SHLFS, DeviceSetName=KSC222GLFS, GateName_1=G$1, Height=mm, LibraryName=KSC222GLFS, Manufacturer_Part_Number=KSC222GLFS, Mouser_Part_Number=611-KSC222GLFS, Mouser_Price-Stock=https://www.mouser.co.uk/ProductDetail/CK/KSC222GLFS?qs=8LLMQjkBYsIt%2F%2FXoP9fBVA%3D%3D, RS_Part_Number=8998582, RS_Price-Stock=http://uk.rs-online.com/web/p/products/8998582, SymbolName_1=KSC222GLFS
SWD: library part "Header 8", "Header, 8-Pin", LatestRevisionDate=17-Jul-2002, LatestRevisionNote="Re-released for DXP Platform.", Publisher="Altium Limited"
U1: "MCP73831 Series Li-Ion/Li-Pol 15 mA - 500 mA 4.2 V Charge Controller - SOT-23-5", Package="SOT-23 Microchip", Availability=Unavailable, MF=Microchip, MP=MCP73831T-2ATI/OT, Price=None, SnapEDA_Link=https://www.snapeda.com/parts/MCP73831T-2ATI/OT/Microchip/view-part/51423/?ref=snap
U2: "RFM95W 869/915MHZ RF Transceiver Module", Package="SMD-16 Hope Microelectronics", Availability=Unavailable, MF=RF, MP=RFM95W-868S2, Price=None, SnapEDA_Link=https://www.snapeda.com/parts/RFM95W-868S2/RF%20Solutions/view-part/329180/?ref=snap
U3: library part 1048, Manufacturer_Name="Keystone Electronics", Allied_Number=70182390, Allied_Price-Stock=https://www.alliedelec.com/keystone-electronics-1048/70182390/, DeviceSetName=1048, GateName_1=G$1, Height=mm, LibraryName=1048, Manufacturer_Part_Number=1048, Mouser_Part_Number=534-1048, Mouser_Price-Stock=https://www.mouser.com/Search/Refine.aspx?Keyword=534-1048, Package=1048, SymbolName_1=1048
Y1: library part NX5032GA-8.000M-STD-CSU-1, Manufacturer_Name=NDK, Package=NX5032GA, DeviceSetName=NX5032GA-8.000M-STD-CSU-1, GateName_1=G$1, Height=mm, LibraryName=NX5032GA-8.000M-STD-CSU-1, Manufacturer_Part_Number=NX5032GA-8.000M-STD-CSU-1, Mouser_Part_Number=344-NX5032GA8MCSU1, Mouser_Price-Stock=https://www.mouser.co.uk/ProductDetail/NDK/NX5032GA-8000M-STD-CSU-1?qs=55YtniHzbhDXxgRf1t%252Bj4Q%3D%3D, RS_Part_Number=1847981, RS_Price-Stock=http://uk.rs-online.com/web/p/products/1847981, SymbolName_1=NX5032GA-8.000M-STD-CSU-1

## Via types
v1: diameter 1, hole 0.711, Top Layer to Bottom Layer, 58 vias
v2: diameter 1.17, hole 0.711, Top Layer to Bottom Layer, 36 vias
v3: diameter 1.27, hole 0.711, Top Layer to Bottom Layer, 10 vias
v4: diameter 1.07, hole 0.711, Top Layer to Bottom Layer, 8 vias
v5: diameter 0.9, hole 0.7, Top Layer to Bottom Layer, 1 vias

## Nets (pads, with @x,y where several pads share a name; then routed paths per layer and width w, separated by ;. In a path a pad name is that pad's centre, name@x,y a point inside that pad or via, vN(x,y) a via of type N, cw(c..) or ccw(c..) an arc to the next point about the centre after c; other vN are vias at no path point)
+3.3v: "ESP Flash.6" BOOT_0.1 BOOT_1.1 C14.2 C16.2 C18.2 C19.1 C21.2 C26.2 C29.2 C30.2 C31.2 C32.2 C34.2 C36.2 C37.2 IC4.12 IC4.13 IC5.1 IC5.13 IC5.19 IC5.32 IC5.48 IC5.64 IC6.8 IC7.4 L1.1 LCD.1 R7.1 R8.1 R9.1 R11.1 R14.2 R15.2 R21.2 R23.1 R27.2 R28.2 R32.2 R33.2 SWD.8 U2.13 | length 648.4
  Top Layer w0.21: 84.684,98.704 IC5.13 ; 88.822,94.234 IC5.19@88.822,95.35 ; 95.326,94.285 IC5.32 ; IC5.48 98.247,104.724
  Top Layer w0.221: 84.76,104.724 IC5.1 ; IC5.64 87.808,108.407
  Top Layer w0.254: v3(58.674,110.744) 58.674,113.792 58.928,114.046 78.232,114.046 v2(79.248,113.03) ; R28.2 60.706,98.044 61.214,97.536 65.138,97.536 66.502,98.9 C26.2 ; LCD.1 68.326,122.428 69.977,120.777 BOOT_0.1 81.534,119.206 v2(81.534,115.57) ; IC4.12 80.496,83.749 80.645,83.898 C18.2@80.645,84.709 ; IC4.13 75.509,84.399 76.073,84.963 C16.2 78.994,84.963 ; C18.2@80.264,84.963 78.994,84.963 ; 84.684,98.704 70.714,98.704 C36.2 ; 84.76,104.724 84.455,105.029 84.455,106.045 79.248,111.252 v2(79.248,113.03) ; 87.808,108.407 87.808,109.042 86.487,110.363 84.455,110.363 C14.2 81.788,110.49 v2(79.248,113.03) ; 88.822,94.234 88.822,90.209 89.154,89.877 89.154,85.852 88.867,85.565 C29.2 87.63,84.096 87.779,83.947 90.783,83.947 ; IC5.19@88.822,95.35 IC5.19 ; R32.2 R32.2@90.758,85.518 ; v2(92.075,82.042) 90.783,83.334 90.783,83.947 ; R33.2 R32.2@90.758,85.518 ; 95.326,94.285 95.631,93.98 105.41,93.98 106.807,92.583 C30.2 106.967,88.011 107.315,88.011 107.569,88.265 v1(109.093,88.265) ; BOOT_1.1 101.6,75.311 104.013,77.724 104.013,79.248 v3(104.14,79.375) ; SWD.8 98.044,122.428 93.98,122.428 91.567,120.015 v2(91.567,117.856) 91.567,117.729 92.456,116.84 92.456,115.476 R14.2 92.235,115.189 R15.2 98.458,115.189 R21.2 98.585,115.062 101.727,115.062 102.743,114.046 C21.2 ; 98.247,104.724 99.949,106.426 99.949,108.712 101.473,110.236 C21.2 ; R27.2 105.57,110.269 R23.1 C21.2 ; v1(114.681,81.28) 114.477,81.484 108.517,81.484 107.982,80.949 105.714,80.949 v3(104.14,79.375) ; C31.2@139.28,64.21 138.857,63.787 C31.2 138.51,63.834 C32.2 135.382,72.009 R9.1 ; IC6.8 IC6.8@143.241,78.9 ; v1(145.542,80.899) 145.24,80.899 IC6.8@143.241,78.9 ; v1(145.957,113.744) 146.084,113.744 147.735,115.395 151.513,115.395 U2.13 151.561,115.443 154.051,115.443 154.305,115.697 C37.2 C37.2@157.607,115.824 ; v1(147.066,83.947) 147.066,84.149 147.574,84.657 R7.1 147.574,88.265 148.336,89.027 152.273,89.027 152.781,88.519 ; v1(152.781,91.567) 152.781,88.519 ; R11.1 153.002,88.298 152.781,88.519 ; IC7.4 IC7.4@153.048,35.974 ; L1.1 157.265,34.718 156.845,35.138 156.845,35.179 156.05,35.974 IC7.4@153.048,35.974 ; 162.56,43.561 161.036,42.037 161.036,38.354 162.04,37.35 162.929,37.35 163.691,36.588 163.691,35.473 162.75,34.532 161.024,34.532 v3(158.242,31.75) 157.607,31.115 C34.2 153.162,35.86 IC7.4@153.048,35.974 ; C26.2 68.039,98.9 68.834,99.695 68.834,104.742 72.136,108.044 C19.1 72.263,112.522 74.93,112.522 76.003,111.449 77.667,111.449 v2(79.248,113.03) ; C26.2 66.896,98.806 C36.2 ; C36.2 70.612,97.409 75.184,92.837 77.597,92.837 79.375,91.059 79.375,85.598 78.994,85.217 78.994,84.963 ; R32.2@90.758,85.518 90.932,85.344 90.932,84.096 90.783,83.947 ; v3(104.14,79.375) 108.585,74.93 130.175,74.93 133.096,72.009 135.128,72.009 R9.1 ; R9.1 135.255,73.66 136.398,74.803 137.795,74.803 138.176,75.184 R8.1 139.319,76.327 140.335,77.343 140.335,79.883 141.351,80.899 142.621,80.899 143.241,80.279 IC6.8@143.241,78.9
  Bottom Layer w0.254: v3(58.674,110.744) 41.529,93.599 41.529,75.587 41.678,75.438 70.803,75.438 71.757,76.392 101.157,76.392 v3(104.14,79.375) ; v2(79.248,113.03) 79.248,113.284 v2(81.534,115.57) 83.82,117.856 v2(91.567,117.856) ; v2@91.948,82.423 94.996,79.375 v3(104.14,79.375) ; v1(109.093,88.265) 109.093,86.487 113.474,82.105 113.855,82.105 v1(114.681,81.28) ; v1(145.542,80.899) 145.542,82.423 v1(147.066,83.947) ; v1(145.957,113.744) 149.987,109.714 149.987,94.361 v1(152.781,91.567) ; v3(158.242,31.75) 158.242,48.006 146.431,59.817 135.89,59.817 116.639,79.068 104.447,79.068 v3(104.14,79.375)
+5v: 1.1 D2.1 D6.2 Q3.1 R2.1 | length 53.9
  Top Layer w0.254: D6.2 138.201,33.63 137.287,34.544 137.287,36.227 Q3.1 139.131,36.261 141.351,38.481 R2.1 144.907,45.466 149.479,40.894 155.448,40.894 158.75,44.196 158.75,50.419 1.1 ; D2.1 154.384,53.975 156.21,53.975 157.861,52.324 1.1@160.528,52.324
GND: 1.2 "ESP Flash.1" BOOT_0.3 BOOT_1.3 C1.1 C3.1 C7.1 C8.1 C9.2 C10.1 C11.1 C12.1 C13.1 C14.1 C15.1 C16.1 C18.1 C19.2 C20.1 C21.1 C22.2 C23.1 C24.1 C26.1 C27.1 C28.1 C29.1 C30.1 C31.1 C32.1 C33.1 C34.1 C36.1 C37.1 IC1.4 IC3.1 IC3.2 IC3.11 IC3.17 IC4.4 IC4.5 IC5.12 IC5.18 IC5.31 IC5.47 IC5.63 IC6.9 IC7.2 J2.1 J2.2 LCD.4 Q1.3 R3.1 R5.1 R6.1 R10.2 R13.2 R17.1 R26.1 R29.2 R30.1 S2.2 SWD.1 U1.2 U2.1 | length 136.6
  Top Layer w0.21: 84.708,99.212 IC5.12 ; 88.316,94.158 IC5.18 ; IC5.63 88.316,108.838 ; 94.818,94.309 IC5.31 ; IC5.47 98.223,104.216 ; IC3.2@126.843,86.737 IC3.1@126.843,87.237
  Top Layer w0.254: S2.2 57.753,105.378 59.436,107.061 62.263,107.061 C23.1 ; IC4.4 IC4.5 68.509,83.749 v1(69.596,84.836) ; C36.1 70.772,101.346 73.66,101.346 75.794,99.212 84.708,99.212 ; C16.1 77.851,87.79 v1(77.851,89.662) ; C14.1 86.962,113.19 87.757,112.395 87.757,110.896 88.316,110.337 88.316,108.838 ; C29.1 87.63,93.472 88.316,94.158 ; 94.818,94.309 94.818,94.108 95.582,93.345 105.156,93.345 105.6,92.901 105.6,85.662 105.664,85.598 106.68,85.598 C30.1 ; 98.223,104.216 100.66,104.216 102.743,106.299 C21.1 ; C10.1 114.727,101.821 116.472,100.076 118.618,100.076 v1(119.634,99.06) ; C13.1 120.937,79.088 120.523,79.502 120.523,82.726 124.533,86.737 IC3.2 127.064,86.737 127.082,86.719 128.546,86.719 IC3.17 129.028,86.737 IC3.11 ; IC1.4 124.635,102.53 124.587,102.482 124.587,101.727 v1(125.349,100.965) 125.551,100.965 126.059,100.457 126.343,100.457 126.492,100.308 126.492,99.154 R6.1 ; Q1.3 133.214,46.167 134.55,44.831 136.398,44.831 137,45.433 R5.1 ; C3.1 139.032,99.822 C1.1 ; C37.1 157.48,109.298 J2.1
  Bottom Layer w0.254: v1(69.596,84.836) 71.882,84.836 76.708,89.662 v1(77.851,89.662) ; v1(119.634,99.06) 123.444,99.06 v1(125.349,100.965)
Net4-20mA_1: 4-20mA.1 C5.2 C6.2 D1.2 Q2.3 | length 70.5
  Top Layer w0.254: C6.2 118.143,94.267 118.745,94.869 122.301,94.869 ; Q2.3 122.385,90.508 122.936,91.059 122.936,92.743 C5.2 122.842,94.328 122.301,94.869 ; D1.2@142.748,99.796 143.384,99.796 143.961,99.219 156.432,99.219 156.718,98.933 157.861,98.933 4-20mA.1 152.527,98.171 149.098,94.742 143.637,94.742 141.351,97.028 124.46,97.028 122.301,94.869
Net4-20mA_2: 4-20mA.2 C5.1 C6.1 D3.1 | length 70.6
  Top Layer w0.254: v2(119.888,83.947) 114.427,83.947 112.522,85.852 112.522,92.202 113.157,92.837 C6.1 115.443,91.567 115.951,91.059 119.761,91.059 120.142,91.44 C5.1 ; v2(130.397,81.553) 130.493,81.458 132.143,81.458 D3.1@132.194,81.407 ; D3.1@132.08,81.407 D3.1@132.194,81.407 ; D3.1 D3.1@132.194,81.407 ; 4-20mA.2 158.496,94.234 153.289,94.234 151.257,92.202 148.844,92.202 138.049,81.407 D3.1@132.194,81.407
  Bottom Layer w0.254: v2(119.888,83.947) 122.269,81.566 v2@130.27,81.566
NetBOOT_0_2: BOOT_0.2 R12.2 | length 13.1
  Top Layer w0.254: BOOT_0.2 83.987,122.301 86.487,122.301 89.154,119.634 R12.2@89.154,115.325 ; R12.2@88.415,115.258 R12.2@88.534,115.28 ; R12.2@88.716,115.582 R12.2@88.739,115.582 ; R12.2@89.002,115.297 89.144,115.323 R12.2@89.154,115.325 ; R12.2 R12.2@89.154,115.325
NetBOOT_1_2: BOOT_1.2 R31.1 | length 10.9
  Top Layer w0.254: BOOT_1.2 95.544,80.812 97.409,82.677 R31.1
NetC1_2: C1.2 D1.1 IC1.5 IC1.8 | length 22.4
  Top Layer w0.254: IC1.5 131.537,102.53 ; IC1.8 IC1.8@129.673,104.48 ; v2@130.476,105.283 IC1.8@129.673,104.48 ; D1.1 142.1,101.359 140.97,102.489 C1.2 138.765,102.489 136.774,104.48 IC1.8@129.673,104.48
  Bottom Layer w0.254: v2(130.683,105.537) 132.08,104.14 v2(132.08,102.235)
NetC2_1: C2.1 IC1.2 R1.1 R6.2 | length 15.1
  Top Layer w0.254: R1.1 C2.1 121.158,99.822 121.92,99.06 R6.2 123.698,101.6 122.682,102.616 122.682,103.378 123.134,103.83 IC1.2
NetC3_2: C3.2 IC1.6 | length 7.1
  Top Layer w0.254: IC1.6 130.612,103.18 130.937,103.505 134.353,103.505 135.336,102.522 C3.2
NetC4_1: C4.1 IC2.6 Q1.1 U3.1 U3.3 | length 121.6
  Top Layer w0.254: U3.3 U3.3@46.098,40.005 ; Q1.1 128.209,48.067 125.718,50.558 U3.1 126.069,59.436 134.239,59.436 136.204,57.471 IC2.6 139.799,55.306 C4.1
  Top Layer w0.28: U3.3@46.098,40.005 v3(58.674,40.005) ; v3(87.503,54.991) 91.597,59.085 U3.1
  Bottom Layer w0.28: v3(58.674,40.005) 72.517,40.005 v3(87.503,54.991)
NetC4_2: C4.2 IC2.5 R4.2 | length 10.8
  Top Layer w0.254: IC2.5 137.287,54.356 138.303,53.34 138.303,52.6 138.452,52.451 139.7,52.451 C4.2 141.583,52.578 141.732,52.727 141.732,54.864 142.146,55.278 R4.2
NetC7_2: C7.2 C8.2 IC3.13 | length 6.1
  Top Layer w0.254: C7.2 C8.2 129.794,88.874 IC3.13@129.535,88.615
NetC9_1: C9.1 IC3.12 | length 4.2
  Top Layer w0.21: IC3.12@130.713,87.237 131.56,87.237
  Top Layer w0.254: IC3.12@130.49,87.224 130.49,87.235 130.492,87.237 IC3.12 ; 131.56,87.237 132.6,87.237 132.842,86.995 C9.1 C9.1@133.996,87.238
NetC11_2: C11.2 IC3.14 | length 6.9
  Top Layer w0.254: C11.2 125.268,92.202 125.095,92.029 125.095,91.409 126.861,89.643 128.501,89.643 129.021,89.123 129.021,88.429 129.028,88.422 IC3.14@129.028,88.583
NetC15_2: C15.2 C17.2 IC4.11 R16.1 | length 22.6
  Top Layer w0.254: R16.1 56.642,91.313 C15.2@56.769,91.186 ; C15.2 C17.2 61.562,91.219 v2@61.976,90.805 ; v1(70.231,83.185) 70.274,83.142 72.618,83.142 IC4.11
  Bottom Layer w0.254: v2(62.23,90.805) 69.85,83.185 v1(70.231,83.185)
NetC17_1: C17.1 C20.2 IC4.10 R22.1 | length 34.7
  Top Layer w0.254: R22.1 56.642,82.724 C20.2@56.769,82.597 ; C20.2 56.896,82.517 56.896,81.28 58.547,79.629 66.802,79.629 68.58,81.407 v1(68.58,82.423) 68.734,82.269 70.61,82.269 70.79,82.449 IC4.10 ; C17.1 62.484,88.519 v2(62.611,88.392)
  Bottom Layer w0.254: v2(62.611,88.392) v1(68.58,82.423)
NetC22_1: C22.1 IC5.5 Y1.1 | length 27.7
  Top Layer w0.21: 84.734,102.718 IC5.5
  Top Layer w0.254: C22.1 66.675,111.294 68.961,109.008 v4(68.961,108.204) ; v4(71.501,105.918) 72.199,105.22 Y1.1 ; v4(82.169,104.775) 84.201,102.743 84.709,102.743
  Bottom Layer w0.254: v4(68.961,108.204) 71.247,105.918 v4(71.501,105.918) 81.026,105.918 v4(82.169,104.775)
NetC23_2: C23.2 R25.2 Y1.2 | length 19.9
  Top Layer w0.254: C23.2 v4(66.294,109.855) ; v4(73.66,111.379) 74.422,110.617 Y1.2 76.334,109.22 76.356,109.242 77.194,109.242 78.44,107.996 78.44,107.315 R25.2
  Bottom Layer w0.254: v4(66.294,109.855) 71.882,109.855 73.406,111.379 v4(73.66,111.379)
NetC24_2: C24.2 C25.2 IC4.9 R24.1 | length 15.5
  Top Layer w0.254: C24.2 R24.1 C25.2 71.468,79.723 72.661,80.916 IC4.9
NetC25_1: C25.1 C28.2 IC4.8 R29.1 | length 43.4
  Top Layer w0.254: R29.1 57.277,70.866 57.912,70.231 73.787,70.231 74.168,70.612 C28.2 C25.1 75.946,76.708 76.835,77.597 76.835,78.994 v2(76.454,79.375) ; v4(65.405,80.645) 65.561,80.801 65.561,81.115 66.245,81.799 IC4.8
  Bottom Layer w0.254: v4(65.405,80.645) 66.675,79.375 v2(76.454,79.375)
NetC27_2: C27.2 IC5.7 R28.1 S2.1 SWD.5 | length 101.7
  Top Layer w0.21: 84.836,101.727 IC5.7
  Top Layer w0.254: S2.1 58.198,101.378 58.42,101.6 R28.1 60.706,103.759 61.468,104.521 v2(65.405,104.521) 63.754,102.87 C27.2 ; v2(75.057,122.301) 76.442,123.686 103.719,123.686 104.66,122.745 105.601,122.745 SWD.5 ; v2(75.819,102.489) 76.581,101.727 84.836,101.727
  Bottom Layer w0.254: v2(65.405,104.521) 65.532,104.648 70.739,104.648 72.898,102.489 v2(75.819,102.489) 81.534,102.489 83.566,104.521 83.566,105.791 75.057,114.3 v2(75.057,122.301)
NetC33_2: C33.2 D6.1 IC7.1 IC7.3 Q3.3 | length 27.4
  Top Layer w0.254: D6.1 135.001,37.038 135.174,37.211 Q3.3 138.557,37.211 v2(139.319,37.973) ; v2(142.748,39.624) 143.891,38.481 C33.2 147.447,38.481 148.082,37.846 151.384,37.846 151.892,37.338 151.892,36.449 151.45,36.007 IC7.3
  Bottom Layer w0.254: v2(139.319,37.973) 141.097,37.973 v2(142.748,39.624)
NetD2_3: D2.3 U1.4 | length 5.9
  Top Layer w0.254: U1.4 150.307,49.088 152.908,51.689 153.159,51.689 153.416,51.432 D2.3
NetD3_2: D3.2 IC3.9 | length 3.9
  Top Layer w0.21: IC3.9@130.713,85.737 131.56,85.737
  Top Layer w0.254: 131.56,85.737 132.207,85.09 D3.2
NetD4_1: D4.1 PT100.3 R16.2 | length 22.8
  Top Layer w0.254: PT100.3 47.211,88.613 R16.2 54.703,88.613 56.448,86.868 62.611,86.868 63.627,85.852 D4.1
NetD4_2: D4.2 IC4.6 | length 3.2
  Top Layer w0.254: D4.2 65.177,83.286 65.364,83.099 IC4.6
NetD5_1: D5.1 PT100.2 R22.2 | length 17
  Top Layer w0.254: D5.1 50.165,80.518 49.276,81.407 v2(49.276,85.725) 51.054,85.725 51.308,85.471 53.039,85.471 R22.2
  Bottom Layer w0.254: PT100.2 44.268,89.336 45.665,89.336 v2(49.276,85.725)
NetD5_2: D5.2 IC4.7 | length 15
  Top Layer w0.254: D5.2 v2(54.229,80.518) ; v2(64.262,81.788) 64.389,81.788 65.024,82.423 66.759,82.423 IC4.7
  Bottom Layer w0.254: v2(54.229,80.518) 62.992,80.518 v2(64.262,81.788)
NetD7_1: D7.1 R2.2 | length 14.4
  Top Layer w0.254: R2.2 143.35,48.166 148.209,43.307 153.44,43.307 D7.1
NetD7_2: D7.2 U1.1 | length 10.9
  Top Layer w0.254: U1.1 147.259,50.988 147.828,50.419 147.828,47.625 149.376,46.077 D7.2
"NetESP Flash_2": "ESP Flash.2" IC6.1 R7.2 | length 63.3
  Top Layer w0.254: R7.2 150.274,84.676 151.892,83.058 155.829,83.058 157.241,81.646 IC6.1 157.241,67.422 164.973,59.69 164.973,34.798 164.465,34.29 163.449,34.29 162.56,33.401
"NetESP Flash_3": "ESP Flash.3" IC6.12 R9.2 | length 52.8
  Top Layer w0.254: R9.2 141.478,72.136 149.241,64.373 IC6.12 149.241,61.94 150.801,60.381 152.906,60.381 158.804,54.483 160.909,54.483 162.56,52.832 162.56,49.022 160.274,46.736 160.274,38.227 162.56,35.941
"NetESP Flash_4": "ESP Flash.4" IC5.43 IC6.16 | length 179
  Top Layer w0.21: 94.513,102.21 IC5.43@96.571,102.21
  Top Layer w0.254: v1(92.837,103.886) 94.513,102.21 ; v2(110.744,117.729) 117.983,117.729 123.444,123.19 159.333,123.19 164.846,117.677 164.846,114.554 165.1,114.3 165.1,78.359 v3(162.433,75.692) ; v1(155.956,67.818) 155.956,66.675 157.241,65.39 IC6.16 157.241,62.56 157.353,62.447 157.353,60.833 158.623,59.563 v1(159.893,59.563)
  Bottom Layer w0.254: v1(92.837,103.886) 92.837,104.521 96.296,107.98 96.296,108.284 96.901,108.888 96.901,113.665 103.378,120.142 108.331,120.142 v2(110.744,117.729) ; v1(155.956,67.818) 155.956,69.215 v3(162.433,75.692) ; v1(159.893,59.563) 161.921,57.535 161.921,49.29 161.429,48.797 161.429,40.553 162.37,39.612 162.37,38.671 162.56,38.481
"NetESP Flash_5": "ESP Flash.5" IC5.42 IC6.15 | length 150.8
  Top Layer w0.21: IC5.42 v1(99.822,101.727)
  Top Layer w0.254: v1(108.585,101.092) 108.585,101.576 112.927,105.918 113.792,105.918 115.189,107.315 131.826,107.315 133.858,105.283 143.573,105.283 143.79,105.066 143.79,101.09 144.669,100.211 145.399,100.211 150.09,104.902 162.814,104.902 163.449,104.267 v2(163.449,83.693) ; v1(155.575,74.549) 155.075,74.049 155.075,66.136 155.241,65.97 IC6.15 155.241,61.94 159.142,58.039 161.544,58.039 163.957,55.626 163.957,42.545 162.56,41.148 162.56,41.021
  Bottom Layer w0.254: v1@99.949,101.6 100.457,101.092 v1(108.585,101.092) ; v1(155.575,74.549) 158.496,74.549 163.449,79.502 v2(163.449,83.693)
NetIC2_1: IC2.1 Q1.6 | length 8.7
  Top Layer w0.254: IC2.1 134.686,55.306 135.143,54.849 135.143,53.053 135.539,52.657 Q1.6
NetIC2_2: IC2.2 R5.2 | length 11.3
  Top Layer w0.254: v2(133.604,51.841) 133.604,51.992 134.585,52.973 134.585,53.839 134.362,54.062 134.223,54.062 133.929,54.356 IC2.2 ; v2@137.354,49.717 137.1,49.717 v2(136.906,49.911) 137.922,49.911 138.43,49.403 138.43,48.26 R5.2
  Bottom Layer w0.254: v2(133.604,51.841) 134.976,51.841 v2(136.906,49.911)
NetIC2_3: IC2.3 Q1.4 | length 9.6
  Top Layer w0.254: IC2.3 133.204,53.006 133.204,52.807 132.207,51.81 132.207,51.181 133.604,49.784 133.604,49.657 134.366,48.895 134.366,46.609 134.808,46.167 Q1.4
NetIC3_4: IC3.4 IC4.1 IC5.21 | length 106.1
  Top Layer w0.21: IC5.21 89.814,96.368 ; 126.142,85.737 IC3.4@126.843,85.737
  Top Layer w0.254: IC4.1 67.112,86.349 67.183,86.42 v1(67.183,88.9) ; v1@89.027,96.774 89.408,96.774 89.814,96.368 ; IC5.21 IC5.21@89.816,95.35 ; v1(125.603,85.344) 125.749,85.344 126.142,85.737
  Bottom Layer w0.254: v1(67.183,88.9) 72.061,88.9 75.339,92.178 84.177,92.178 v1(89.027,97.028) 95.377,97.028 99.209,93.196 109.496,93.196 110.109,92.583 110.109,86.233 113.538,82.804 117.602,82.804 120.65,79.756 136.63,79.756 136.779,79.905 136.779,81.788 136.044,82.523 126.113,82.523 125.576,83.06 125.576,85.317 v1(125.603,85.344)
NetIC3_5: IC3.5 IC4.16 IC5.23 | length 74
  Top Layer w0.21: IC5.23@90.805,95.961 90.805,97.282 ; 126.871,84.355 127.126,84.1 127.762,84.1 IC3.5@128.028,84.366
  Top Layer w0.254: IC4.16 72.7,86.349 72.771,86.42 v2(72.771,91.186) ; v2(78.867,94.234) 84.348,94.234 88.412,98.298 90.551,98.298 90.805,98.044 90.805,97.282 91.44,96.647 100.502,96.647 100.801,96.348 101.891,96.348 102.19,96.647 115.062,96.647 v1(115.57,97.155) ; v1(124.587,84.328) 124.614,84.355 126.871,84.355 ; IC3.5@128.028,84.366 IC3.5@128.028,84.552
  Bottom Layer w0.254: v2(72.771,91.186) 75.819,94.234 v2(78.867,94.234) ; v1(115.57,97.155) 124.587,88.138 v1(124.587,84.328)
NetIC3_6: IC3.6 IC5.51 R21.1 | length 75
  Top Layer w0.21: IC5.51 94.31,109.042 ; 128.397,83.693 128.528,83.824 IC3.6@128.528,84.552
  Top Layer w0.254: 94.31,109.042 95.377,110.109 96.647,110.109 98.298,111.76 98.298,112.141 R21.1 100.488,112.395 101.123,113.03 v2(101.219,113.03) ; v4(126.492,83.439) 128.143,83.439 128.397,83.693
  Bottom Layer w0.254: v2(101.219,113.03) 124.891,113.03 124.891,113.011 126.257,113.011 133.858,105.41 133.858,90.805 v4(126.492,83.439)
NetIC3_7: IC3.7 IC5.40 R27.1 | length 51.4
  Top Layer w0.21: IC5.40 98.425,100.711 ; 127.713,82.296 129.021,83.604 IC3.7@129.021,84.545
  Top Layer w0.254: 98.425,100.711 102.235,100.711 107.442,105.918 107.95,105.918 ; v1(107.823,104.648) 107.95,104.775 107.95,105.918 ; R27.1 108.331,106.299 107.95,105.918 ; v1(123.444,83.185) 124.333,82.296 127.713,82.296
  Bottom Layer w0.254: v1(107.823,104.648) 107.823,103.759 112.191,99.391 112.191,98.375 123.444,87.122 v1(123.444,83.185)
NetIC3_8: IC3.8 IC4.15 IC5.22 R33.1 | length 83.3
  Top Layer w0.21: 129.528,83.935 IC3.8@129.528,84.552
  Top Layer w0.254: IC4.15 74.269,85.699 75.438,86.868 v4(75.438,90.297) ; 90.323,94.561 90.323,94.467 90.361,94.429 90.361,94.17 92.075,92.456 93.345,92.456 94.107,91.694 94.107,89.662 ; 90.322,94.562 IC5.22 ; v1(92.329,90.805) 92.964,90.805 94.107,89.662 ; R33.1 94.107,89.662 ; v2(106.807,81.915) 107.188,82.296 116.586,82.296 121.412,77.47 125.603,77.47 126.619,78.486 126.619,79.629 129.528,82.538 129.528,83.935
  Bottom Layer w0.254: v4(75.438,90.297) 75.946,90.805 v1(92.329,90.805) 101.219,81.915 v2(106.807,81.915)
NetIC3_10: IC3.10 IC5.39 R30.2 | length 75.3
  Top Layer w0.21: IC5.39 98.298,100.203 ; IC3.10@130.713,86.237 131.695,86.237
  Top Layer w0.254: 98.298,100.203 105.664,100.203 107.135,101.674 107.135,101.693 107.984,102.542 108.003,102.542 110.617,105.156 110.617,107.188 R30.2 112.268,107.569 117.983,113.284 v3(117.983,114.935) ; 131.695,86.237 131.699,86.233 133.096,86.233 133.241,86.088 135.745,86.088 136.017,86.36 v2(136.017,94.615)
  Bottom Layer w0.254: v3(117.983,114.935) 118.618,114.3 125.38,114.3 125.457,114.377 126.257,114.377 126.334,114.3 126.492,114.3 136.017,104.775 v2(136.017,94.615)
NetIC3_16: IC3.16 Q2.1 | length 9.8
  Top Layer w0.254: Q2.1 120.41,87.818 120.41,87.235 121.539,86.106 123.063,86.106 125.349,88.392 IC3.16@128.021,88.392
NetIC4_2: IC4.2 IC5.20 R32.1 | length 38.3
  Top Layer w0.21: 89.306,94.209 IC5.20
  Top Layer w0.254: IC4.2 66.856,85.628 67.903,85.628 67.934,85.598 68.326,85.598 68.707,85.979 v1(68.707,87.884) ; 89.306,94.209 89.329,94.186 89.355,94.16 89.355,94.122 89.639,93.838 89.677,93.838 90.678,92.837 R32.1 90.378,88.298 89.955,88.721 89.955,91.528 v1(89.789,91.694)
  Bottom Layer w0.254: v1(68.707,87.884) 71.73,87.884 75.54,91.694 v1(89.789,91.694)
NetIC4_3: IC4.3 R17.2 | length 7.6
  Top Layer w0.254: R17.2 62.1,85.217 63.122,84.194 64.779,84.194 65.04,84.455 65.072,84.455 65.666,85.049 IC4.3
NetIC4_14: IC4.14 IC5.38 | length 38.9
  Top Layer w0.21: 95.783,99.72 IC5.38
  Top Layer w0.254: v1(69.215,89.916) 69.215,88.9 70.866,87.249 70.866,85.852 71.669,85.049 IC4.14 ; v1(91.186,99.441) 91.465,99.72 95.783,99.72
  Bottom Layer w0.254: v1(69.215,89.916) 78.74,99.441 v1(91.186,99.441)
NetIC5_6: IC5.6 R25.1 | length 8.2
  Top Layer w0.21: 84.606,102.211 IC5.6@85.952,102.211
  Top Layer w0.254: R25.1 80.805,104.615 83.209,102.211 84.606,102.211 ; IC5.6@85.952,102.211 IC5.6
NetIC5_16: IC5.16 IC6.7 | length 83
  Top Layer w0.254: v1(83.439,95.885) 83.558,96.004 83.558,96.766 83.998,97.206 IC5.16 ; v1(83.566,93.218) 83.566,92.964 84.582,91.948 v1(84.582,86.995) ; v1(143.637,74.168) 145.241,75.772 IC6.7
  Bottom Layer w0.254: v1(83.439,95.885) 83.439,93.345 v1(83.566,93.218) ; v1(84.582,86.995) 84.582,84.963 85.725,83.82 92.075,83.82 94.946,80.949 108.312,80.949 109.505,79.756 117.348,79.756 122.936,74.168 v1(143.637,74.168)
NetIC5_17: IC5.17 IC6.10 R13.1 | length 111.5
  Top Layer w0.22: 87.806,94.41 IC5.17@87.806,95.35
  Top Layer w0.254: v1(86.487,93.091) 87.806,94.41 ; IC5.17@87.806,95.35 IC5.17 ; v1(145.161,66.294) 145.161,62.8 IC6.10 ; v1(157.48,84.201) 158.463,85.184 R13.1
  Bottom Layer w0.254: v1(86.487,93.091) 97.028,93.091 106.426,83.693 v2(109.982,83.693) 113.284,80.391 117.856,80.391 121.031,77.216 142.748,77.216 146.05,73.914 146.05,68.58 145.161,67.691 v1(145.161,66.294) 158.242,79.375 159.131,79.375 160.401,80.645 160.401,82.677 158.877,84.201 v1(157.48,84.201)
NetIC5_28: IC5.28 R31.2 | length 9.9
  Top Layer w0.21: 93.32,94.209 IC5.28
  Top Layer w0.254: 93.32,94.209 93.342,94.186 93.342,93.531 95.052,91.821 96.647,91.821 97.409,91.059 R31.2
NetIC5_33: IC5.33 U2.5 | length 67.6
  Top Layer w0.21: IC5.33 100.628,97.206
  Top Layer w0.254: 100.628,97.206 101.002,96.832 101.69,96.832 102.521,97.663 114.832,97.663 115.205,98.036 115.935,98.036 116.435,97.536 129.159,97.536 129.54,97.917 137.795,97.917 v1(137.922,98.044) ; U2.5 141.875,113.427 v1(142.748,114.3)
  Bottom Layer w0.254: v1(137.922,98.044) 139.954,98.044 141.859,99.949 141.859,113.411 v1(142.748,114.3)
NetIC5_34: IC5.34 U2.4 | length 47
  Top Layer w0.21: IC5.34@97.182,97.712 v5@101.297,97.712
  Top Layer w0.254: IC5.34 IC5.34@97.182,97.712 ; v5@101.297,97.712 v5(101.346,97.663) ; v1(106.934,100.203) 107.619,100.888 107.619,101.492 108.185,102.058 108.203,102.058 114.857,108.712 123.19,108.712 129.921,115.443 U2.4@136.457,115.443
  Bottom Layer w0.254: v5(101.346,97.663) 102.235,97.663 104.775,100.203 v1(106.934,100.203)
NetIC5_35: IC5.35 U2.2 | length 61.7
  Top Layer w0.21: IC5.35 99.263,98.222
  Top Layer w0.254: 99.263,98.222 99.968,98.222 100.24,98.494 114.979,98.494 115.005,98.52 116.135,98.52 116.161,98.494 116.401,98.494 116.586,98.679 v1(117.729,98.679) ; v2(122.428,110.998) 124.792,110.998 130.103,116.309 138.28,116.309 140.357,118.386 140.357,118.596 139.526,119.427 U2.2
  Bottom Layer w0.254: v1(117.729,98.679) 117.729,108.839 120.269,108.839 v2(122.428,110.998)
NetIC5_36: IC5.36 U2.3 | length 49
  Top Layer w0.21: IC5.36 98.565,98.704
  Top Layer w0.254: 98.565,98.704 98.666,98.806 99.441,98.806 99.949,99.314 109.601,99.314 110.109,99.822 110.109,101.854 v1(110.744,102.489) ; v2(117.729,110.744) 119.253,112.268 120.396,112.268 125.555,117.427 U2.3
  Bottom Layer w0.254: v1@110.744,102.87 110.744,103.22 117.729,110.205 v2(117.729,110.744) v2@117.729,110.871
NetIC5_46: IC5.46 R23.2 SWD.6 | length 36.6
  Top Layer w0.21: IC5.46 98.401,103.708
  Top Layer w0.254: 98.401,103.708 100.181,103.708 ; v1(101.473,102.87) 101.273,102.87 101.146,102.743 100.181,103.708 ; SWD.6 103.378,122.428 103.378,119.38 106.934,115.824 v2(106.934,111.887) ; R23.2 105.537,106.68 102.565,103.708 100.181,103.708
  Bottom Layer w0.254: v1(101.473,102.87) 102.997,102.87 106.934,106.807 v2(106.934,111.887)
NetIC5_49: IC5.49 SWD.7 | length 20.1
  Top Layer w0.21: IC5.49 v1@95.326,108.205
  Top Layer w0.254: v3(94.869,119.38) 97.536,119.38 SWD.7 ; v1@95.326,108.205 v1(95.326,108.509)
  Bottom Layer w0.254: v3(94.869,119.38) 94.869,109.22 95.326,108.763 v1(95.326,108.509)
NetIC5_50: IC5.50 SWD.3 | length 27.7
  Top Layer w0.21: 94.816,105.515 IC5.50@94.816,106.576
  Top Layer w0.254: 94.816,105.515 94.794,105.493 94.794,105.283 95.175,104.902 v1(95.377,104.902) ; IC5.50@94.816,106.576 IC5.50 ; v2(106.934,118.745) 110.744,122.555 SWD.3